# Altium PCB MainBoard.PcbDoc (part 5 of 5)
Units mm, origin at the board's own origin, x right, y up, seen from the top; angles counter-clockwise.
Board outline 82.5 x 82.5 mm, 2 copper layers (Top Layer, Bottom Layer); 145 components, 141 nets, 702 pads, 289 vias.
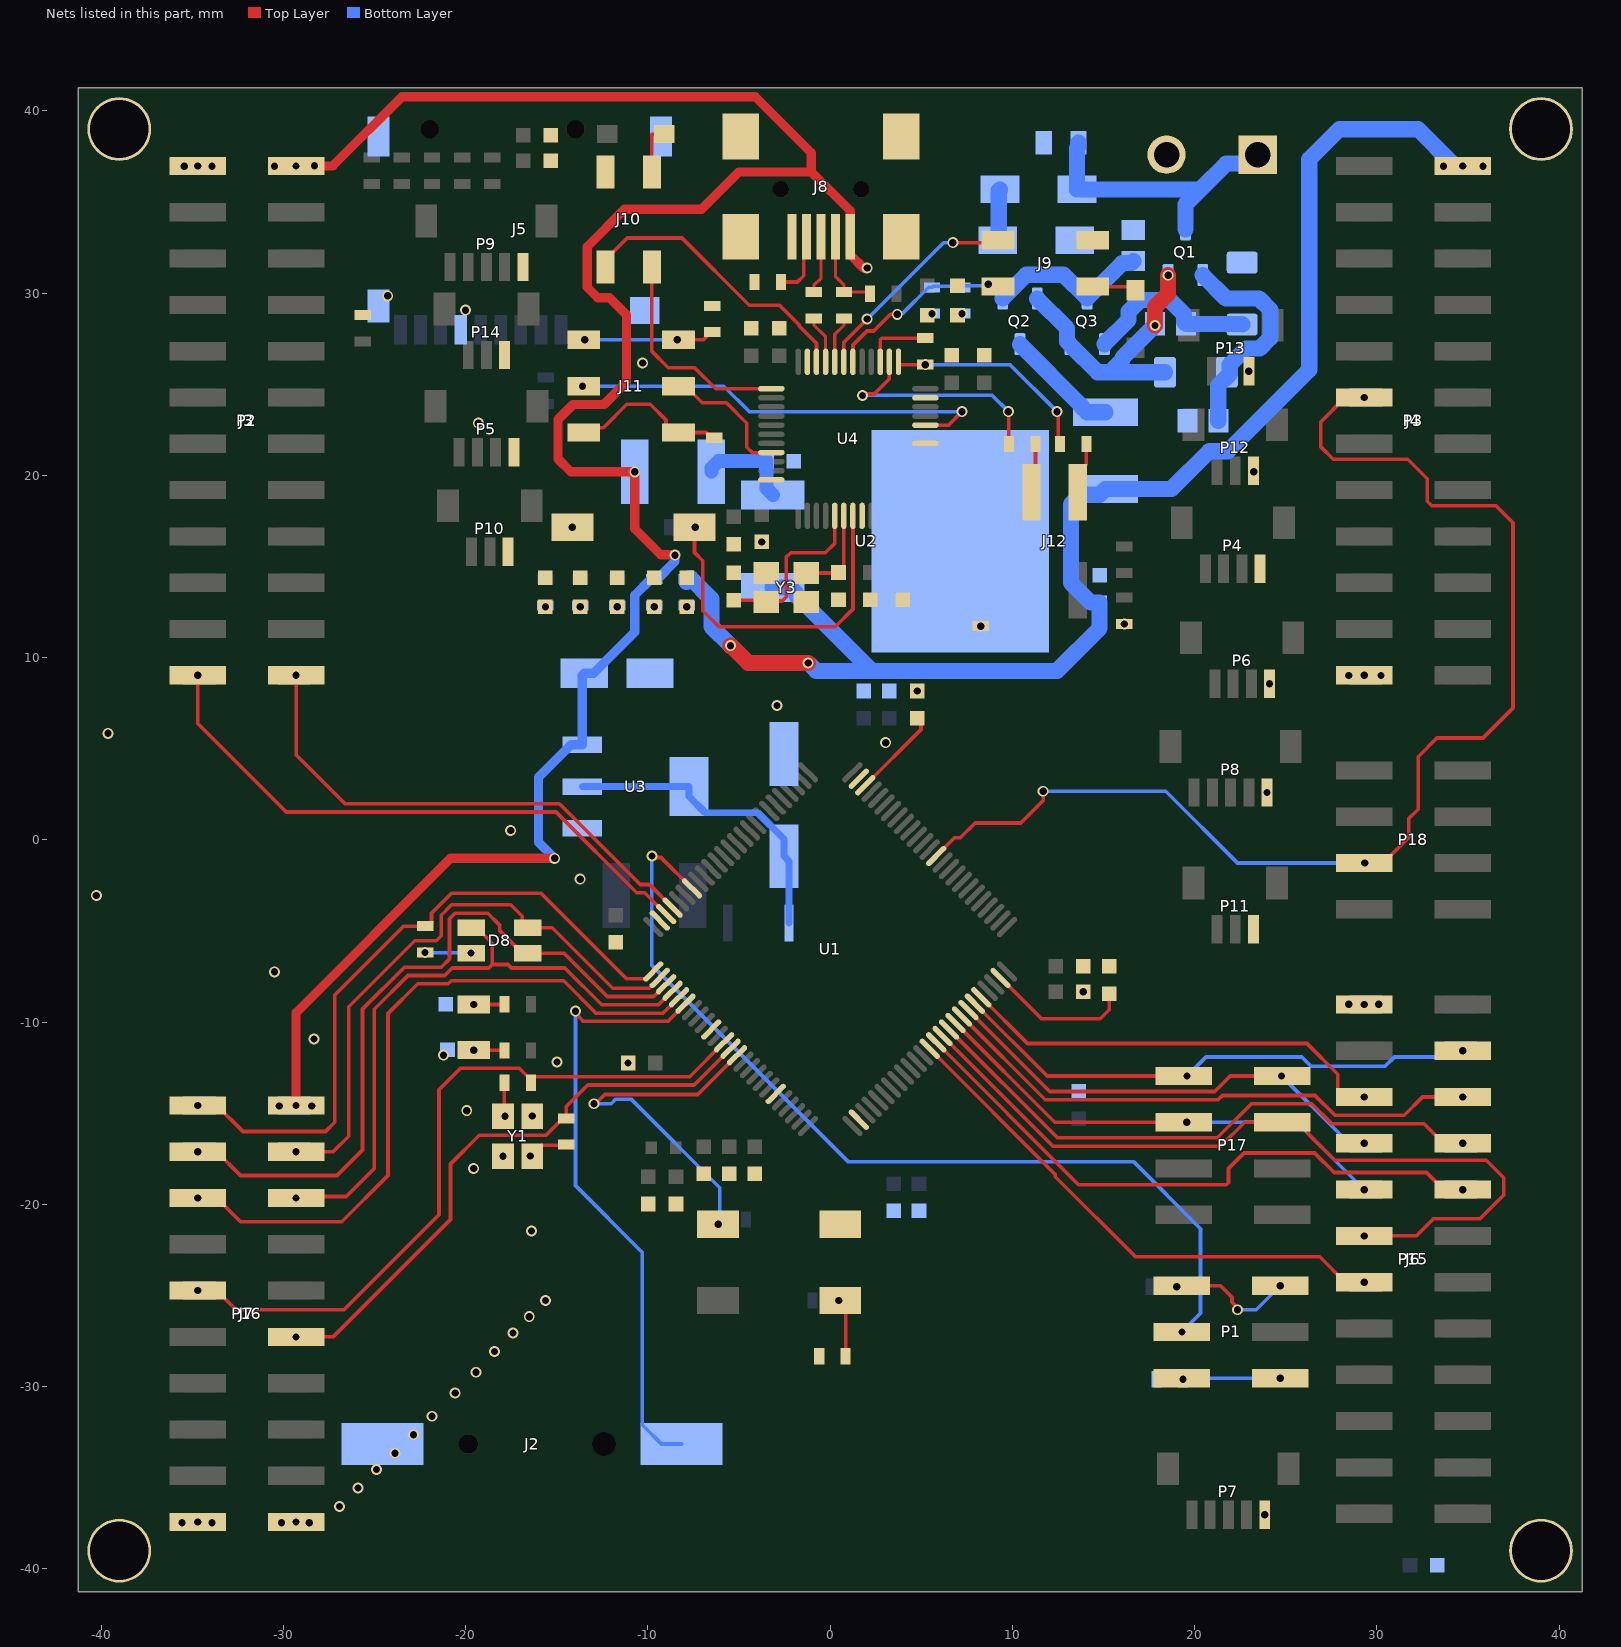
[diagram p3: the nets of this part, all layers, seen from the top]

## Via types
v1: diameter 0.6, hole 0.4, Top Layer to Bottom Layer, 223 vias
v2: diameter 0.6, hole 0.4, Top Layer to Bottom Layer, tented both sides, 66 vias

## Nets (pads, with @x,y where several pads share a name; then routed paths per layer and width w, separated by ;. In a path a pad name is that pad's centre, name@x,y a point inside that pad or via, vN(x,y) a via of type N, cw(c..) or ccw(c..) an arc to the next point about the centre after c; other vN are vias at no path point) (continued)
D15: J4.12 P3.11 P18.5 U1.62 | length 68.3
  Top Layer w0.2: U1.62@5.816,-0.891 5.822,-0.891 6.821,0.108 7.14,0.108 7.959,0.927 10.452,0.927 11.684,2.159 v2(11.684,2.667) ; v1(29.3,24.27) 28.25,24.27 26.924,22.944 26.924,21.555 27.603,20.876 30.997,20.876 31.003,20.882 31.696,20.882 32.766,19.812 32.766,18.573 33.003,18.336 36.528,18.336 37.465,17.399 37.465,7.239 35.814,5.588 33.285,5.588 32.258,4.561 32.258,1.677 31.75,1.169 31.75,0.13 30.35,-1.27 v1(29.337,-1.27)
  Bottom Layer w0.2: v2(11.684,2.667) 18.415,2.667 22.352,-1.27 v1(29.337,-1.27)
D_N: J8.2 R30.1 R31.1 | length 4.7
  Top Layer w0.178: J8.2@0.3,33.087 0.3,30.888 0.762,30.426 R31.1@0.762,30.062 2.106,30.062 R30.1@2.196,29.972
D_P: J8.3 R32.1 | length 3.2
  Top Layer w0.178: R32.1@-0.889,30.062 -0.889,30.426 -0.5,30.815 J8.3@-0.5,33.087
Di_N: R31.2 U4.32 | length 2.6
  Top Layer w0.178: U4.32@0.25,26.225 0.25,27.736 0.762,28.248 R31.2@0.762,28.612
Di_P: R32.2 U4.33 | length 2.7
  Top Layer w0.178: R32.2@-0.889,28.612 -0.889,28.248 -0.25,27.609 U4.33@-0.25,26.225
E0: J3.2 P2.1 U1.97 | length 28.5
  Top Layer w0.2: v1(-29.3,9.03) -29.3,4.662 -26.616,1.978 -14.855,1.978 -10.426,-2.451 -9.913,-2.451 U1.97@-8.644,-3.72
E1: J3.1 P2.2 U1.98 | length 32.7
  Top Layer w0.2: v1(-34.7,9.03) -34.7,6.379 -29.845,1.524 -15.043,1.524 -10.614,-2.905 -10.172,-2.905 -9.44,-3.637 -9.434,-3.637 U1.98@-8.998,-4.073
E2: J7.2 P16.1 R28.1 U1.1 | length 37.5
  Top Layer w0.2: v1(-34.7,-14.57) -33.65,-14.57 -32.218,-16.002 -27.686,-16.002 -27.178,-15.494 -27.178,-8.509 -23.405,-4.736 R28.1@-22.225,-4.736 -22.05,-4.736 -21.875,-4.561 -21.875,-4.031 -20.765,-2.921 -15.875,-2.921 -11.176,-7.62 -10.105,-7.62 U1.1@-9.705,-7.22
E3: D8.4 J7.3 P16.4 U1.2 | length 32.7
  Top Layer w0.2: v1(-29.3,-17.11) -27.27,-17.11 -26.416,-16.256 -26.416,-9.151 -22.797,-5.532 -21.609,-5.532 -21.336,-5.259 -21.336,-4.134 -20.77,-3.568 -20.713,-3.568 -20.701,-3.556 -17.526,-3.556 -16.889,-4.193 -16.889,-4.522 D8.4@-16.585,-4.826 -15.24,-4.826 -11.922,-8.144 -9.922,-8.144 U1.2@-9.351,-7.573
E4: D8.3 J7.4 P16.3 U1.3 | length 40.4
  Top Layer w0.2: v1(-34.7,-17.11) -33.65,-17.11 -32.345,-18.415 -27.051,-18.415 -25.654,-17.018 -25.654,-9.285 -23.354,-6.985 -21.336,-6.985 -20.882,-6.531 -20.882,-4.322 -20.582,-4.022 -18.788,-4.022 -18.135,-4.675 -18.135,-4.977 -17.482,-5.63 -16.885,-6.226 -14.602,-6.226 -12.23,-8.598 -9.675,-8.598 -9.44,-8.363 -9.434,-8.363 U1.3@-8.998,-7.927
E5: D8.2 J7.5 P16.6 U1.4 | length 35
  Top Layer w0.2: v1(-29.3,-19.65) -29.216,-19.566 -26.551,-19.566 -25.019,-18.034 -25.019,-9.292 -23.166,-7.439 -21.145,-7.439 -20.736,-7.03 -18.733,-7.03 -18.542,-6.839 ; D8.2@-19.685,-4.826 -19.385,-4.826 -18.789,-5.422 -18.542,-5.668 -18.542,-6.839 ; U1.4@-8.644,-8.28 -8.65,-8.28 -9.422,-9.052 -12.538,-9.052 -14.56,-7.03 -17.482,-7.03 -17.673,-6.839 -18.542,-6.839
E6: J7.6 P16.5 U1.5 | length 38.7
  Top Layer w0.2: v1(-34.7,-19.65) -33.65,-19.65 -32.345,-20.955 -26.797,-20.955 -24.257,-18.415 -24.257,-9.525 -22.625,-7.893 -20.957,-7.893 -20.793,-7.729 -14.623,-7.729 -12.846,-9.506 -9.169,-9.506 -8.296,-8.634 U1.5@-8.291,-8.634
E7: J6.11 P15.12 U1.38 | length 29.2
  Top Layer w0.2: U1.38@5.462,-11.462 12.356,-18.356 12.356,-18.488 16.747,-22.879 26.859,-22.879 28.25,-24.27 v1(29.3,-24.27)
E8: J6.16 P15.15 U1.39 | length 34.1
  Top Layer w0.2: U1.39@5.816,-11.109 13.63,-18.923 21.737,-18.923 21.854,-18.806 21.854,-18.034 22.708,-17.18 26.578,-17.18 27.651,-18.253 32.713,-18.253 33.65,-19.19 v1(34.7,-19.19)
E9: J6.13 P15.14 P17.5 U1.40 | length 44.8
  Top Layer w0.2: U1.40@6.17,-10.755 12.216,-16.802 21.432,-16.802 22.74,-15.494 25.833,-15.494 26.233,-15.894 26.233,-16.133 27.679,-17.58 35.995,-17.58 36.957,-18.542 36.957,-19.484 35.657,-20.783 33.096,-20.783 32.149,-21.73 v1(29.3,-21.73)
E10: J6.18 P15.17 U1.41 | length 32.3
  Top Layer w0.2: U1.41@6.523,-10.402 12.469,-16.348 21.244,-16.348 23.114,-14.478 26.416,-14.478 27.505,-15.567 32.567,-15.567 33.65,-16.65 v1(34.7,-16.65)
E11: J6.15 P15.16 P17.6 U1.42 | length 26.1
  Top Layer w0.2: U1.42@6.877,-10.048 12.322,-15.494 P17.6@19.398,-15.494
  Bottom Layer w0.2: v1(19.558,-15.494) 25.604,-15.494 v1(29.3,-19.19)
E12: J6.20 P15.19 U1.43 | length 30.3
  Top Layer w0.2: U1.43@7.23,-9.695 11.798,-14.262 21.283,-14.262 21.521,-14.024 26.604,-14.024 27.693,-15.113 31.496,-15.113 32.499,-14.11 v1(34.7,-14.11)
E13: J6.17 P15.18 P17.7 U1.44 | length 25.5
  Top Layer w0.2: U1.44@7.584,-9.341 12.051,-13.808 21.095,-13.808 21.949,-12.954 P17.7@24.798,-12.954
  Bottom Layer w0.2: v1(24.765,-12.954) 28.061,-16.25 28.9,-16.25 v1(29.3,-16.65)
E14: J6.22 P15.21 P17.8 U1.45 | length 29.2
  Top Layer w0.2: U1.45@7.937,-8.988 11.904,-12.954 P17.8@19.398,-12.954
  Bottom Layer w0.2: v1(19.581,-12.958) 20.625,-11.914 25.877,-11.914 26.387,-12.424 30.447,-12.424 30.957,-11.914 34.356,-11.914 v1(34.7,-11.57)
E15: J6.19 P15.20 U1.46 | length 23.8
  Top Layer w0.2: U1.46@8.291,-8.634 10.833,-11.176 26.162,-11.176 27.85,-12.864 27.85,-13.71 28.25,-14.11 v1(29.3,-14.11)
GND: C1.1 C2.1 C3.1 C4.1 C5.1 C6.1 C7.1 C8.1 C9.1 C10.1 C11.1 C12.1 C13.1 C14.1 C15.1 C16.1 C17.1 C18.1 C19.1 C20.1 C21.1 C22.1 C23.2 C24.2 C25.1 C26.1 C27.1 C28.1 C29.1 C30.1 C31.1 C32.1 C33.1 C34.1 C35.1 C36.1 C37.1 C38.1 D1.1 D4.C D5.A D6.1 D7.1 D9.1 D13.1 D14.1 J1.2 J2.N J3.23 J4.24 J5.6 J5.G1 J5.G2 J5.G3 J5.G4 J6.23 J7.19 J7.20 J8.5 J8.Shell J9.4 J10.4 P2.24 P3.23 P4.4 P5.4 P6.4 P7.5 P8.5 P9.5 P10.3 P11.3 P12.3 P13.3 P14.3 P15.24 P16.19 P16.20 R4.1 R5.1 R7.1 R14.1 R16.1 R17.1 R26.1 R29.2 R35.1 Scr1.1 Scr2.1 Scr3.1 Scr4.1 SW2.1 SW3.1 U1.10 U1.20 U1.27 U1.74 U1.99 U2.3 U3.1 U4.8 U4.23 U4.35 U4.47 Y1.2 Y1.4 Y3.2 Y3.4
  other v1: -35.56,-37.465 -33.909,-37.465 -30.099,-37.465 -28.575,-37.465 -34.7,-37.43 -29.3,-37.43 23.844,-37.031 -11.088,-12.243 29.3,-9.03 28.448,-9.017 30.099,-9.017 28.448,9.017 30.226,9.017 29.3,9.03 -3.759,16.344 -35.433,36.957 -33.909,36.957 -34.7,36.97
  other v2: -26.924,-36.576 -25.908,-35.56 -24.892,-34.544 -23.876,-33.655 -22.86,-32.639 -21.844,-31.623 -20.574,-30.353 -19.431,-29.21 -18.415,-28.067 -17.399,-27.051 -16.51,-26.162 -15.621,-25.273 -16.383,-21.463 -19.558,-18.034 -17.945,-17.356 -16.345,-15.156 -19.939,-14.859 -14.986,-12.192 -21.209,-11.811 -28.321,-10.922 13.882,-8.331 -30.48,-7.239 -40.259,-3.048 -13.716,-2.159 -17.526,0.508 23.971,2.593 3.048,5.334 -39.624,5.842 -2.921,7.366 4.775,8.167 24.106,8.562 8.255,11.721 16.143,11.848 -14.145,17.145 23.241,20.193 -19.304,22.86 22.971,25.707 -10.287,26.162 -20.003,29.062 -24.276,29.845
H0: J7.10 P16.9 R10.2 U1.12 | length 40.1
  Top Layer w0.2: v1(-34.7,-24.73) -33.65,-24.73 -32.599,-25.781 -26.67,-25.781 -21.463,-20.574 -21.463,-13.716 -20.278,-12.531 -17.054,-12.531 -16.425,-13.16 R10.2@-16.425,-13.172 ; R10.2@-16.425,-13.335 R10.2@-16.425,-13.172 ; U1.12@-5.816,-11.109 -5.822,-11.109 -7.71,-12.997 -16.25,-12.997 R10.2@-16.425,-13.172
H1: J7.11 P16.12 R9.1 U1.13 | length 32.6
  Top Layer w0.2: v1(-29.3,-27.27) -27.27,-27.27 -20.828,-20.828 -20.828,-17.78 -19.258,-16.21 -15.586,-16.21 -14.653,-15.277 R9.1@-14.478,-15.277 -14.478,-14.628 -13.301,-13.451 -7.451,-13.451 U1.13@-5.462,-11.462
HD_5V: C23.1 F2.1 J3.24 J7.1 J8.1 P2.23 P16.2 R25.2 U3.3 | length 122.7
  Top Layer w0.508: v1(-29.3,36.97) -29.294,36.976 -27.286,36.976 -23.495,40.767 -4.112,40.767 -1.04,37.695 -1.04,36.645 ; P16.2@-29.075,-14.57 v1(-29.3,-14.57) -29.3,-9.488 -20.828,-1.016 v1(-15.113,-1.016) ; v1(-8.509,15.621) -8.527,15.639 -9.288,15.639 -10.719,17.069 v1(-10.719,20.193) -14.224,20.193 -14.93,20.899 -14.93,23.062 -14.108,23.884 -12.412,23.884 -11.176,25.12 -11.176,28.812 -12.11,29.746 -12.747,29.746 -13.327,30.326 -13.327,32.546 -11.278,34.596 -7.06,34.596 -5.011,36.645 -1.04,36.645 ; v1(2.032,31.369) 1.826,31.369 1.1,32.095 J8.1@1.1,33.087 1.096,33.091 1.096,34.509 -1.04,36.645
  Bottom Layer w0.508: v1(-15.113,-1.016) -16.002,-0.127 -16.002,3.432 -14.223,5.211 U3.3@-13.598,5.211 -13.598,9.03 C23.1@-13.484,9.144 -12.984,9.144 -10.726,11.402 -10.726,13.415 -9.827,14.314 R25.2@-9.652,14.314 -9.477,14.314 -8.509,15.282 v1(-8.509,15.621)
  other v1: -30.226,-14.605 -28.448,-14.605 -30.48,36.957 -28.29,36.976
HD_Vin: C21.2 F1.1 J4.1 P3.2 R27.2 U2.1 | length 79.6
  Top Layer w0.889: v1@-5.461,10.668 -4.499,9.706 v1(-1.208,9.706)
  Bottom Layer w0.889: R27.2@-7.874,14.314 -7.874,14.15 -7.673,14.351 -7.648,14.351 -6.513,13.216 -6.513,11.704 v1(-5.464,10.654) ; U2.1@-3.144,13.843 -2.194,13.843 -1.838,13.487 -1.838,13.39 2.28,9.271 ; v1@-1.143,9.652 -0.762,9.271 2.28,9.271 ; v1(34.7,36.97) 34.2,36.97 34.144,37.026 34.144,37.103 32.258,38.989 27.94,38.989 26.289,37.338 26.289,25.791 21.816,21.318 20.795,21.318 18.73,19.253 F1.1@15.113,19.253 14.795,18.936 13.729,18.936 13.208,18.415 13.208,14.109 14.3,13.017 C21.2@14.783,13.017 14.783,11.608 12.446,9.271 2.28,9.271
  other v1: 33.655,36.957 35.814,36.957
LED_STLINK: J9.1 R38.1 R40.1 U4.30 | length 9.8
  Top Layer w0.2: U4.30@1.25,26.225 1.25,27.151 2.02,27.921 2.398,27.921 3.306,28.829 v1(3.683,28.829)
  Bottom Layer w0.2: v1(3.683,28.829) 3.76,28.906 4.003,28.906 5.413,30.316 R38.1@5.588,30.316 5.651,30.379 7.175,30.379 R40.1@7.239,30.316 7.33,30.407 8.59,30.407 v1(8.667,30.483)
M_MCU_BOOT0: P1.3 U1.94 | length 51.1
  Top Layer w0.2: v1(-9.779,-0.889) -9.702,-0.966 -9.283,-0.966 -7.589,-2.659 U1.94@-7.584,-2.659
  Bottom Layer w0.2: v1(-9.779,-0.889) -9.779,-6.894 0.98,-17.653 16.637,-17.653 20.32,-21.336 20.32,-25.98 v1(19.3,-27)
MCU-RESET: R8.1 SW2.2 U1.14 | length 19.7
  Top Layer w0.2: v1(-12.954,-14.478) -12.872,-14.478 -12.364,-13.97 -7.269,-13.97 -5.115,-11.816 U1.14@-5.109,-11.816
  Bottom Layer w0.2: v1(-12.954,-14.478) -12.011,-14.478 -11.757,-14.224 -10.922,-14.224 -6.059,-19.087 R8.1@-6.059,-20.828
  other v1: -6.144,-21.082
NetC8_2: C8.2 U1.49 | length 8
  Top Layer w0.2: U1.49@9.351,-7.573 11.592,-9.814 14.824,-9.814 15.316,-9.322 C8.2@15.316,-8.446
NetC13_2: C13.2 U1.73 | length 5
  Top Layer w0.2: U1.73@1.927,2.998 4.983,6.054 4.983,6.459 C13.2@4.775,6.667
NetC16_2: C16.2 R9.2 Y1.1 | length 2.3
  Top Layer w0.2: v1(-16.446,-17.348) -16.438,-17.356 Y1.1@-16.345,-17.356 -16.345,-17.256 -15.845,-16.756 -15.331,-16.756 -15.328,-16.753 -14.504,-16.753 R9.2@-14.478,-16.727
NetC17_2: C17.2 R10.1 Y1.3 | length 1.8
  Top Layer w0.2: Y1.3@-17.945,-15.156 -17.875,-15.086 R10.1@-17.875,-13.335
  other v1: -17.844,-15.164
NetC18_2: C18.2 R12.2 Y2.1 | length 1.7
  Top Layer w0.2: v1(-19.558,-11.537) -17.89,-11.537 R12.2@-17.87,-11.557
NetC19_2: C19.2 R13.1 Y2.2 | length 1.7
  Top Layer w0.2: v1(-19.558,-9.037) -17.89,-9.037 R13.1@-17.87,-9.017
NetC20_2: C20.2 D2.C J1.1 Q1.3 | length 15.8
  Bottom Layer w0.889: C20.2@13.625,38.252 13.625,38.052 13.545,37.973 D2.C@13.545,35.687 20.32,35.687 ; Q1.3@19.492,33.498 19.492,34.859 20.32,35.687 ; J1.1@23.455,37.592 22.966,37.103 21.736,37.103 20.32,35.687
NetC22_2: C22.2 F2.0 U2.2 | length 5.4
  Bottom Layer w0.762: F2.0@-6.517,20.193 -6.517,20.396 -6.136,20.777 C22.2@-3.493,20.777 -3.493,19.272 U2.2@-3.144,18.923
NetC24_1: C24.1 F3.0 U3.2 U3.4 | length 17.3
  Bottom Layer w0.381: U3.2@-13.598,2.921 U3.4@-7.738,2.921 -7.738,2.371 -6.853,1.486 -3.971,1.486 -2.54,0.055 C24.1@-2.54,-0.895 -2.261,-1.174 F3.0@-2.261,-4.572
NetD1_2: D1.2 R3.1
  other v1: -15.621,12.789
NetD2_A: D2.A D4.A | length 2.8
  Bottom Layer w0.889: D4.A@9.188,32.893 9.252,32.956 9.252,35.623 D2.A@9.315,35.687
NetD3_A: D3.A Q1.1 R16.2 | length 12.2
  Bottom Layer w0.889: Q1.1@20.442,30.988 20.442,30.977 21.717,29.702 23.526,29.702 24.155,29.073 24.155,27.547 23.557,26.95 22.802,26.95 21.973,26.121 21.973,26.111 21.922,26.06 21.922,25.56 21.297,24.935 R16.2@21.297,22.987
NetD3_K: D3.K Q1.2 Q2.2 Q3.2 R15.2 | length 15.5
  Top Layer w0.889: v2(17.819,28.221) 17.819,29.234 18.542,29.957 v2(18.542,30.977)
  Bottom Layer w0.889: Q2.2@11.364,29.703 11.364,29.692 12.998,28.058 12.998,27.343 Q3.2@13.147,27.193 ; Q3.2@13.296,27.032 14.675,25.654 15.824,25.654 ; v2(17.819,28.221) 16.041,26.442 16.041,26.342 15.588,25.89 15.824,25.654 ; D3.K@18.366,25.654 15.824,25.654
NetD5_K: D5.K Q3.1 R15.1 | length 9.6
  Bottom Layer w0.889: Q3.1@15.047,27.193 15.047,27.204 16.373,28.53 16.373,28.987 17.002,29.616 18.636,29.616 19.413,28.838 19.413,28.427 R15.1@19.519,28.321 19.544,28.296 22.581,28.296 D5.K@22.606,28.272
NetD6_2: D6.2 R24.1
  other v1: -13.716,12.789
NetD7_2: D7.2 R25.1
  other v1: -9.652,12.789
NetD8_1: D8.1 R28.2 | length 2.5
  Bottom Layer w0.2: v1(-22.225,-6.186) -22.215,-6.196 -19.715,-6.196 v1(-19.705,-6.206)
NetD9_2: D9.2 R27.1
  other v1: -7.874,12.789
NetD10_A: D10.A J9.2 | length 2.4
  Top Layer w0.2: J9.2@14.411,30.353 16.556,30.353 D10.A@16.764,30.145
NetD11_A: D11.A J10.2 | length 2.8
  Top Layer w0.2: J10.2@-9.779,36.636 -9.779,38.721 -9.112,38.721 D11.A@-9.098,38.735
NetD12_1: D12.1 R38.2
  other v1: 5.588,28.866
NetD13_2: D13.2 R40.2
  other v1: 7.239,28.866
NetD14_2: D14.2 R41.2
  other v1: -11.684,12.789
NetF1_0: F1.0 Q2.3 | length 6.3
  Bottom Layer w0.889: Q2.3@10.414,27.193 10.414,27.182 13.779,23.816 13.779,23.772 14.097,23.455 F1.0@15.113,23.455
NetJ2_P: J2.P U1.6 | length 33.5
  Top Layer w0.2: v1(-13.97,-9.398) -13.97,-9.506 -13.676,-9.8 -13.676,-9.819 -13.535,-9.96 -8.91,-9.96 U1.6@-7.937,-8.988
  Bottom Layer w0.2: v1(-13.97,-9.398) -13.97,-18.969 -10.304,-22.635 -10.304,-32.097 -9.254,-33.147 J2.P@-8.154,-33.147
NetJ8_4: J8.4 R29.1 | length 3.6
  Top Layer w0.2: R29.1@-2.704,30.607 -1.791,30.607 -1.45,30.948 -1.45,32.937 J8.4@-1.3,33.087
NetJ11_1: J11.1 J11.2 R34.1 | length 8.7
  Top Layer w0.2: J11.2@-13.522,22.352 -13.261,22.613 -12.439,22.613 -11.157,23.895 -9.865,23.895 -9.005,23.035 -9.005,22.752 -8.605,22.352 -6.816,22.352 -6.525,22.061 R34.1@-6.35,22.061
NetJ11_5: J11.5 J11.6 R35.2 | length 7.1
  Top Layer w0.2: J11.5@-8.322,27.432 -6.943,27.432 -6.525,27.85 R35.2@-6.477,27.85
  Bottom Layer w0.2: v1(-13.462,27.432) v1(-8.382,27.432)
NetJ12_1: J12.1 R36.2 | length 2.8
  Top Layer w0.2: J12.1@13.589,19.083 13.589,20.133 14.06,20.604 R36.2@14.06,21.717
NetJ12_3: J12.3 R37.2 | length 2.7
  Top Layer w0.2: J12.3@11.049,19.083 11.266,19.3 R37.2@11.266,21.717
NetP1_1: P1.1 P1.2 R11.1 | length 6.7
  Top Layer w0.2: P1.1@19.3,-24.46 21.412,-24.46 22.048,-25.096 22.048,-25.368 22.352,-25.673 v1(22.352,-25.781)
  Bottom Layer w0.2: v1(22.352,-25.781) 23.379,-25.781 v1(24.7,-24.46)
  other v1: 19.013,-24.511
NetP1_5: P1.5 P1.6 R14.2 | length 5.4
  Bottom Layer w0.2: v1(19.357,-29.591) 19.408,-29.54 v1(24.7,-29.54)
NetQ2_1: Q2.1 Q3.3 R17.2 | length 9.1
  Bottom Layer w0.889: Q2.1@9.464,29.703 9.464,29.714 10.756,31.006 12.805,31.006 Q3.3@14.097,29.714 ; Q3.3@14.097,29.703 Q3.3@14.097,29.714 ; R17.2@16.637,31.75 16.531,31.644 16.027,31.644 Q3.3@14.097,29.714
NetR6_2: R6.2 R7.2 SW1.1 | length 3.3
  Top Layer w0.2: v1(0.471,-25.273) SW1.1@0.556,-25.273 0.852,-25.569 R7.2@0.852,-28.321
NetR33_2: R33.2 U4.27 | length 3.7
  Top Layer w0.2: U4.27@2.75,26.225 2.75,27.445 2.827,27.522 R33.2@5.221,27.522
RST-STM8: U4.18
STL-RESET: R39.1 SW3.2 U4.7 | length 18.9
  Top Layer w0.2: SW3.2@-7.445,17.145 -7.445,15.769 -6.985,15.309 -6.985,12.573 -6.096,11.684 0.273,11.684 1.25,12.661 U4.7@1.25,17.775
  other v1: -7.403,17.145
STL_BOOT0: J11.3 U4.44 | length 6.7
  Top Layer w0.2: J11.3@-8.322,24.892 -7.922,24.892 -7.011,23.981 -5.693,23.981 -4.572,22.86 -4.572,21.542 -4.276,21.246 U4.44@-3.937,21.246
STL_BOOT1: J11.4 U4.20 | length 23.7
  Top Layer w0.2: U4.20@5.225,22.75 6.494,22.75 v1(7.239,23.495)
  Bottom Layer w0.2: v1(-13.589,24.892) -5.842,24.892 -4.445,23.495 v1(7.239,23.495)
STL_OSC_IN: C38.2 U4.5 Y3.3 | length 9.7
  Top Layer w0.2: C38.2@-5.283,13.144 -3.614,13.144 Y3.3@-3.513,13.043 -3.454,13.102 -2.63,13.102 -2.418,13.315 -2.418,15.499 -2.169,15.748 -0.262,15.748 0.25,16.26 U4.5@0.25,17.775
STL_OSC_OUT: C37.2 U4.6 Y3.1 | length 5
  Top Layer w0.2: Y3.1@-1.313,14.643 0.431,14.643 0.75,14.962 U4.6@0.75,17.775
STL_RX: J9.3 U4.31 | length 11.8
  Top Layer w0.2: U4.31@0.75,26.225 0.754,26.229 0.754,27.297 v1(2.032,28.575) ; v1(6.731,32.766) 9.084,32.766 J9.3@9.211,32.893
  Bottom Layer w0.2: v1(2.032,28.575) 6.223,32.766 v1(6.731,32.766)
STL_SWCLK: J10.1 U4.37 | length 12
  Top Layer w0.2: J10.1@-9.779,31.436 -9.779,26.797 -8.89,25.908 -7.437,25.908 -6.279,24.75 U4.37@-3.225,24.75
STL_SWDIO: J10.3 U4.34 | length 15.9
  Top Layer w0.2: J10.3@-12.319,31.436 -12.319,31.836 -11.135,33.02 -8.128,33.02 -4.445,29.337 -2.779,29.337 -1.693,28.251 -1.693,28.19 -0.75,27.247 U4.34@-0.75,26.225
STM32_SWCLK: R37.1 U4.26 | length 12.9
  Top Layer w0.2: v1(1.778,24.384) 1.855,24.461 2.416,24.461 3.25,25.295 U4.26@3.25,26.225 ; v1(9.779,23.495) 9.797,23.477 9.797,21.736 R37.1@9.816,21.717
  Bottom Layer w0.2: v1(1.778,24.384) 8.89,24.384 v1(9.779,23.495)
STM32_SWDIO: R33.1 R36.1 U4.25 | length 11.7
  Top Layer w0.2: U4.25@3.75,26.225 3.75,26.118 3.796,26.072 v1(5.221,26.072) ; v1(12.446,23.495) 12.523,23.418 12.523,21.804 R36.1@12.61,21.717
  Bottom Layer w0.2: v1(5.221,26.072) 9.869,26.072 v1(12.446,23.495)
pads on no net: J2. J5. J8.MH1 J8.MH2 P4.MP1 P4.MP2 P5.MP1 P5.MP2 P6.MP1 P6.MP2 P7.MP1 P7.MP2 P8.MP1 P8.MP2 P9.MP1 P9.MP2 P10.MP1 P10.MP2 P11.MP1 P11.MP2 P12.MP1 P12.MP2 P13.MP1 P13.MP2 P14.MP1 P14.MP2 U4.1 U4.2 U4.3 U4.4 U4.10 U4.11 U4.12 U4.13 U4.14 U4.15 U4.16 U4.17 U4.19 U4.21 U4.22 U4.28 U4.29 U4.38 U4.39 U4.40 U4.41 U4.42 U4.43 U4.45 U4.46

## Polygon pours and split planes (outlines as drawn)
GND on Top Layer "GND_L01_P000" (solid, remove dead copper, pour order 0): -41.148,41.148 41.148,41.148 41.148,-41.148 -41.148,-41.148
GND on Bottom Layer "GND_L02_P001" (solid, pour order 1): 41.148,41.148 41.148,-41.148 40.964,-40.964 -41.148,-40.964 -41.148,41.148 -41.122,41.122 -41.148,41.148

## Silkscreen, mask and mechanical layers (free items; w line width, h text height)
Top Overlay:
  lines w0.1: -38.862,-37.973 -38.862,-13.081 ; -38.735,7.874 -38.735,36.703 ; -21.385,-1.714 -15.748,-1.714 ; -18.567,-3.302 -18.567,-0.127 ; -18.161,13.716 -16.383,15.494 ; -16.319,15.494 -16.383,15.494 ; -13.795,15.494 -16.256,15.494 -16.383,15.494 ; 38.735,-37.719 38.735,-8.89 ; 38.735,7.874 38.735,36.957 ; -21.385,-3.302 -15.748,-3.302 -15.748,-0.127 -21.385,-0.127 -21.385,-3.302
  lines w0.154: -14.554,6.401 -14.554,10.922 ; -12.649,6.401 -12.649,10.922 ; -10.744,6.401 -10.744,10.922 ; -8.839,6.401 -8.839,10.922 ; 20.955,31.115 20.955,33.592 ; -16.332,6.35 -6.985,6.35 -6.985,10.922 -16.332,10.922 -16.332,6.35 ; 15.955,31.115 25.955,31.115 25.955,33.592 15.955,33.592 15.955,31.115
  lines w0.254: -40.767,-31.115 -37.084,-31.115 ; -40.64,-35.56 -36.957,-35.56 ; -40.64,-33.528 -36.957,-33.528 ; -40.64,-28.575 -36.957,-28.575 ; -40.64,-26.035 -36.957,-26.035 ; -40.64,-23.495 -36.957,-23.495 ; -40.64,-20.828 -36.957,-20.828 ; -40.64,-18.415 -36.957,-18.415 ; -40.64,-15.748 -36.957,-15.748 ; -40.513,10.16 -36.83,10.16 ; -40.513,12.7 -36.83,12.7 ; -40.513,15.24 -36.83,15.24 ; -40.513,17.653 -36.83,17.653 ; -40.513,20.32 -36.83,20.32 ; -40.513,22.733 -36.83,22.733 ; -40.513,25.4 -36.83,25.4 ; -40.513,27.94 -36.83,27.94 ; -40.513,30.353 -36.83,30.353 ; -40.513,32.893 -36.83,32.893 ; -40.513,35.56 -36.83,35.56 ; -24.638,4.953 -24.257,4.953 -23.622,5.588 -23.622,31.369 -23.622,31.75 -22.86,32.512 ; -23.622,14.605 -23.622,14.732 -21.971,16.383 ; -23.622,19.177 -22.098,20.701 ; -23.622,25.527 -23.495,25.527 -22.098,26.924 ; 8.001,4.826 8.001,8.763 ; 10.16,11.684 10.16,11.176 10.16,8.763 ; 11.557,-28.321 16.637,-28.321 ; 11.557,-25.654 16.637,-25.654 ; 12.192,-19.304 15.875,-19.304 ; 12.192,-16.764 15.875,-16.764 ; 12.192,-14.097 15.875,-14.097 ; 14.034,-30.607 14.034,-23.368 ; 14.034,-22.352 14.034,-11.874 ; 17.018,-34.417 15.494,-32.893 15.367,-32.893 -9.017,-32.893 ; 17.526,0.127 17.526,0.508 18.796,1.778 ; 17.526,7.239 17.526,7.366 18.796,8.636 ; 17.526,11.176 10.541,11.176 10.541,-5.588 17.526,-5.588 ; 17.526,12.827 17.526,13.081 18.923,14.478 ; 17.526,18.796 18.923,20.193 ; 18.71,-4.404 17.526,-5.588 ; 19.05,25.527 17.526,24.003 ; 36.83,-2.667 40.64,-2.667 ; 36.83,-0.127 40.64,-0.127 ; 36.83,2.667 40.513,2.667 ; 36.957,-35.433 40.64,-35.433 ; 36.957,-32.893 40.64,-32.893 ; 36.957,-30.353 40.64,-30.353 ; 36.957,-27.94 40.64,-27.94 ; 36.957,-25.273 40.64,-25.273 ; 36.957,-22.86 40.64,-22.86 ; 36.957,-20.193 40.64,-20.193 ; 36.957,-17.653 40.64,-17.653 ; 36.957,-15.24 40.64,-15.24 ; 36.957,-12.7 40.64,-12.7 ; 36.957,-10.033 40.64,-10.033 ; 36.957,10.414 40.64,10.414 ; 36.957,12.954 40.64,12.954 ; 36.957,15.494 40.64,15.494 ; 36.957,17.907 40.64,17.907 ; 36.957,20.574 40.64,20.574 ; 36.957,22.987 40.64,22.987 ; 36.957,25.654 40.64,25.654 ; 36.957,28.194 40.64,28.194 ; 36.957,30.607 40.64,30.607 ; 36.957,33.147 40.64,33.147 ; 36.957,35.814 40.64,35.814 ; 38.735,-4.572 38.735,4.826 ; -9.017,-32.893 -10.668,-31.242 -12.573,-31.242 -15.875,-34.544 ccw(c-18.86,-33.867) -21.844,-34.544 -10.668,-34.544 -9.017,-32.893 ; 10.16,8.763 5.842,8.763 5.842,4.826 10.16,4.826 10.16,8.763 ; 17.526,-5.588 17.526,24.003 ; 17.526,24.003 17.526,23.876 17.526,24.003 ; -39.353,-2.286 -32.353,-2.286 -32.353,4.714 -39.353,4.714 -39.353,-2.286 ; -39.243,-11.049 -32.243,-11.049 -32.243,-4.049 -39.243,-4.049 -39.243,-11.049 ; -31.623,-5.715 -24.384,-5.715 -24.384,4.953 -31.623,4.953 -31.623,-5.715 ; 11.43,-30.607 16.764,-30.607 16.764,-23.368 11.43,-23.368 11.43,-30.607 ; 18.288,-40.894 25.4,-40.894 25.4,-38.227 18.288,-38.227 18.288,-40.894
  text "GND" at -40.923,35.831 h1
  text "5V" at -38.764,35.831 h1
  text "A13" at 36.547,35.831 h1
  text "VIN" at 38.706,35.831 h1
  text "A11" at 36.576,33.528 h1
  text "A12" at 38.735,33.528 h1
  text "A15" at -40.894,33.274 h1
  text "A14" at -38.735,33.274 h1
  text "GND" at 15.955,31.115 h1
  text "VIN" at 20.955,31.115 h1
  text "A9" at 36.512,30.988 h1
  text "A10" at 38.798,30.988 h1
  text "C11" at -40.957,30.734 h1
  text "C10" at -38.672,30.734 h1
  text "C9" at 36.512,28.448 h1
  text "A8" at 38.798,28.448 h1
  text "D0" at -40.957,28.194 h1
  text "C12" at -38.672,28.194 h1
  text "C7" at 36.512,25.908 h1
  text "C8" at 38.798,25.908 h1
  text "D2" at -40.957,25.654 h1
  text "D1" at -38.672,25.654 h1
  text "D15" at 36.512,23.368 h1
  text "C6" at 38.798,23.368 h1
  text "D4" at -40.957,23.114 h1
  text "D3" at -38.672,23.114 h1
  text "STM32F103C8T6" at -2.048,21.524 h0.6
  text "D13" at 36.512,20.955 h1
  text "D14" at 38.798,20.955 h1
  text "D6" at -40.957,20.701 h1
  text "D5" at -38.672,20.701 h1
  text "D11" at 36.512,18.288 h1
  text "D12" at 38.798,18.288 h1
  text "B3" at -40.957,18.034 h1
  text "D7" at -38.672,18.034 h1
  text "D9" at 36.512,15.748 h1
  text "D10" at 38.798,15.748 h1
  text "B5" at -40.957,15.494 h1
  text "B4" at -38.672,15.494 h1
  text "B15" at 36.512,13.208 h1
  text "D8" at 38.798,13.208 h1
  text "B7" at -40.957,12.954 h1
  text "B6" at -38.672,12.954 h1
  text "B13" at 36.512,10.668 h1
  text "B14" at 38.798,10.668 h1
  text "B9" at -40.957,10.414 h1
  text "B8" at -38.672,10.414 h1
  text "CAN1" at 10.541,9.915 h0.7
  text "SWD" at 5.715,8.839 h0.7
  text "A11" at 10.576,8.323 h0.7
  text "A12" at 13.243,8.323 h0.7
  text "GND" at 15.529,8.323 h0.7
  text "GND" at 36.512,8.255 h1
  text "B12" at 38.798,8.128 h1
  text "E1" at -40.957,8.001 h1
  text "E0" at -38.672,7.874 h1
  text "I2C3" at 10.541,7.121 h0.7
  text "STLINK RESET" at -17.941,6.604 h1 r90
  text "3V3 MCU" at -14.554,6.35 h0.8 r90
  text "3V3 STLINK" at -12.649,6.35 h0.7 r90
  text "3V3 STLINK" at -10.744,6.35 h0.7 r90
  text "5V" at -8.839,6.35 h0.7 r90
  text "VIN" at -6.934,6.35 h0.7 r90
  text "A8" at 13.116,5.529 h0.7
  text "GND" at 15.529,5.529 h0.7
  text "A9" at 10.48,5.508 h0.7
  text "POWER LED" at -16.415,4.902 h0.7
  text "SWCLK" at 8.064,4.858 h1 r90
  text "SWDIO" at 10.223,4.858 h1 r90
  text "TIMMER" at 36.449,4.864 h0.7
  text "USART1" at 10.541,4.327 h0.7
  text "SPI3" at -31.623,3.743 h0.7
  text "C9" at 36.512,2.921 h1
  text "C8" at 38.798,2.921 h1
  text "A8" at 10.685,2.735 h0.7
  text "A9" at 12.146,2.735 h0.7
  text "A10" at 13.86,2.735 h0.7
  text "GND" at 15.529,2.735 h0.7
  text "A15" at -31.444,2.227 h0.63
  text "C10" at -29.93,2.227 h0.63
  text "C11" at -28.507,2.227 h0.63
  text "C12" at -27.237,2.227 h0.63
  text "GND" at -26.254,2.227 h0.63
  text "USART3" at 10.541,1.533 h0.7
  text "CAN2" at -31.559,1.038 h0.7
  text "QR1" at -37.719,0.508 h1.52
  text "C7" at 36.512,0.381 h1
  text "C6" at 38.798,0.381 h1
  text "D10" at 10.83,-0.059 h0.7
  text "D8" at 12.273,-0.059 h0.7
  text "D9" at 13.987,-0.059 h0.7
  text "GND" at 15.529,-0.059 h0.7
  text "B5" at -31.207,-0.44 h0.7
  text "B6" at -28.794,-0.44 h0.7
  text "GND" at -26.508,-0.44 h0.7
  text "SPI2" at 10.541,-1.261 h0.7
  text "USART2" at -31.686,-1.629 h0.7
  text "PE5" at -21.385,-1.714 h0.7
  text "PE3" at -18.567,-1.714 h0.7
  text "D15" at 36.512,-2.159 h1
  text "D14" at 38.798,-2.159 h1
  text "B15" at 10.593,-2.853 h0.63
  text "B14" at 12.107,-2.853 h0.63
  text "B13" at 13.53,-2.853 h0.63
  text "B12" at 14.8,-2.853 h0.63
  text "GND" at 15.783,-2.853 h0.63
  text "D7" at -31.352,-3.107 h0.7
  text "D5" at -29.891,-3.107 h0.7
  text "D6" at -28.177,-3.107 h0.7
  text "GND" at -26.508,-3.107 h0.7
  text "LED RGB" at -21.412,-3.302 h0.7 r90
  text "PE2" at -21.385,-3.302 h0.7
  text "PE4" at -18.567,-3.302 h0.7
  text "I2C2" at 10.541,-3.928 h0.7
  text "I2C1" at -31.559,-4.306 h0.7
  text "D13" at 36.512,-4.572 h1
  text "D12" at 38.798,-4.699 h1
  text "A9" at 10.576,-5.52 h0.7
  text "A8" at 13.116,-5.52 h0.7
  text "GND" at 15.402,-5.52 h0.7
  text "B8" at -28.921,-5.774 h0.7
  text "GND" at -26.508,-5.774 h0.7
  text "B9" at -31.557,-5.795 h0.7
  text "STM32F407VxT6" at -6.35,-7.62 h1.52
  text "QR2" at -37.609,-8.255 h1.52
  text "GND" at 36.547,-9.762 h1
  text "B10" at 38.706,-9.762 h1
  text "TIMMER" at 11.684,-11.9 h0.7
  text "B11" at 36.576,-12.319 h1
  text "E14" at 38.735,-12.319 h1
  text "E14" at 11.782,-13.826 h1
  text "E13" at 14.034,-13.97 h1
  text "E15" at 36.512,-14.859 h1
  text "E12" at 38.798,-14.859 h1
  text "E2" at -41.084,-15.24 h1
  text "5V" at -38.798,-15.24 h1
  text "E11" at 11.811,-16.383 h1
  text "E9" at 13.97,-16.383 h1
  text "E13" at 36.512,-17.399 h1
  text "E10" at 38.798,-17.399 h1
  text "E4" at -41.084,-17.907 h1
  text "E3" at -38.798,-17.907 h1
  text "A3" at 11.747,-18.923 h1
  text "A2" at 14.034,-18.923 h1
  text "E11" at 36.512,-19.939 h1
  text "E8" at 38.798,-19.939 h1
  text "E6" at -41.084,-20.447 h1
  text "E5" at -38.798,-20.447 h1
  text "A1" at 11.747,-21.463 h1
  text "A0" at 14.034,-21.463 h1
  text "RESET" at 2.191,-21.971 h1
  text "E9" at 36.512,-22.479 h1
  text "B2" at 38.798,-22.479 h1
  text "C14" at -41.084,-22.987 h1
  text "C13" at -38.798,-22.987 h1
  text "E7" at 36.512,-24.892 h1
  text "B0" at 38.798,-24.892 h1
  text "1" at 11.43,-25.4 h1
  text "H0" at -41.084,-25.527 h1
  text "C15" at -38.798,-25.527 h1
  text "1" at 14.16,-25.654 h1
  text "WAKE UP" at 2.175,-26 h0.7
  text "B1" at 36.512,-27.559 h1
  text "C5" at 38.798,-27.559 h1
  text "C0" at -41.084,-28.067 h1
  text "H1" at -38.798,-28.067 h1
  text "BOOT1" at 11.557,-28.321 h0.7
  text "BOOT0" at 14.16,-28.321 h0.7
  text "C4" at 36.512,-30.099 h1
  text "A7" at 38.798,-30.099 h1
  text "0" at 11.874,-30.353 h1
  text "0" at 14.16,-30.353 h1
  text "C2" at -41.084,-30.607 h1
  text "C1" at -38.798,-30.607 h1
  text "A6" at 36.512,-32.639 h1
  text "A5" at 38.798,-32.639 h1
  text "A0" at -41.084,-33.147 h1
  text "C3" at -38.798,-33.147 h1
  text "https://github.com/3T-CODE/PIF_RYA_2025" at -9.144,-34.486 h1
  text "A4" at 36.512,-35.179 h1
  text "A3" at 38.798,-35.179 h1
  text "A2" at -41.084,-35.433 h1
  text "A1" at -38.798,-35.433 h1
  text "GND" at -41.138,-37.156 h1
  text "GND" at -38.738,-37.156 h1
  text "3V3" at 36.512,-37.592 h1
  text "3V3" at 38.798,-37.719 h1
  text "MAINBOARD V3" at -11.453,-39.127 h4
  text "SPI1" at 18.288,-39.488 h0.7
  text "A4" at 18.34,-41.08 h0.63
  text "A5" at 19.854,-41.08 h0.63
  text "A6" at 21.277,-41.08 h0.63
  text "A7" at 22.547,-41.08 h0.63
  text "GND" at 23.53,-41.08 h0.63
Bottom Overlay:
  drawing of 54 lines, arcs and shapes, not listed
  text "GND" at -38.96,35.831 h1
  text "5V" at -36.547,35.831 h1
  text "A13" at 38.637,35.831 h1
  text "VIN" at 41.177,35.831 h1
  text "A11" at 38.608,33.528 h1
  text "A12" at 41.148,33.528 h1
  text "A15" at -38.989,33.274 h1
  text "A14" at -36.576,33.274 h1
  text "A9" at 38.672,30.988 h1
  text "A10" at 41.084,30.988 h1
  text "C11" at -38.925,30.734 h1
  text "C10" at -36.639,30.734 h1
  text "C9" at 38.672,28.448 h1
  text "A8" at 41.084,28.448 h1
  text "D0" at -38.925,28.194 h1
  text "C12" at -36.639,28.194 h1
  text "C7" at 38.672,25.908 h1
  text "C8" at 41.084,25.908 h1
  text "D2" at -38.925,25.654 h1
  text "D1" at -36.639,25.654 h1
  text "D15" at 38.672,23.368 h1
  text "C6" at 41.084,23.368 h1
  text "D4" at -38.925,23.114 h1
  text "D3" at -36.639,23.114 h1
  text "SD CARD" at -20.812,23.021 h1
  text "A15" at -26.341,21.658 h0.63
  text "C9" at -25.188,21.658 h0.63
  text "C8" at -24.071,21.658 h0.63
  text "GND" at -22.644,21.658 h0.63
  text "C12" at -20.609,21.658 h0.63
  text "3V3" at -19.356,21.658 h0.63
  text "D2" at -17.959,21.658 h0.63
  text "C11" at -16.689,21.658 h0.63
  text "C10" at -15.292,21.658 h0.63
  text "D13" at 38.672,20.955 h1
  text "D14" at 41.084,20.955 h1
  text "D6" at -38.925,20.701 h1
  text "D5" at -36.639,20.701 h1
  text "D11" at 38.672,18.288 h1
  text "D12" at 41.084,18.288 h1
  text "B3" at -38.925,18.034 h1
  text "D7" at -36.639,18.034 h1
  text "D9" at 38.672,15.748 h1
  text "D10" at 41.084,15.748 h1
  text "B5" at -38.925,15.494 h1
  text "B4" at -36.639,15.494 h1
  text "B15" at 38.672,13.208 h1
  text "D8" at 41.084,13.208 h1
  text "B7" at -38.925,12.954 h1
  text "B6" at -36.639,12.954 h1
  text "B13" at 38.672,10.668 h1
  text "B14" at 41.084,10.668 h1
  text "B9" at -38.925,10.414 h1
  text "B8" at -36.639,10.414 h1
  text "GND" at 38.672,8.255 h1
  text "B12" at 41.084,8.128 h1
  text "E1" at -38.925,8.001 h1
  text "E0" at -36.639,7.874 h1
  text "GND" at 38.51,-9.762 h1
  text "B10" at 40.923,-9.762 h1
  text "B11" at 38.481,-12.319 h1
  text "E14" at 40.894,-12.319 h1
  text "E15" at 38.544,-14.859 h1
  text "E12" at 40.831,-14.859 h1
  text "E2" at -39.052,-15.24 h1
  text "5V" at -36.512,-15.24 h1
  text "E13" at 38.544,-17.399 h1
  text "E10" at 40.831,-17.399 h1
  text "E4" at -39.052,-17.907 h1
  text "E3" at -36.512,-17.907 h1
  text "E11" at 38.544,-19.939 h1
  text "E8" at 40.831,-19.939 h1
  text "E6" at -39.052,-20.447 h1
  text "E5" at -36.512,-20.447 h1
  text "E9" at 38.544,-22.479 h1
  text "B2" at 40.831,-22.479 h1
  text "C14" at -39.052,-22.987 h1
  text "C13" at -36.512,-22.987 h1
  text "E7" at 38.544,-24.892 h1
  text "B0" at 40.831,-24.892 h1
  text "H0" at -39.052,-25.527 h1
  text "C15" at -36.512,-25.527 h1
  text "B1" at 38.544,-27.559 h1
  text "C5" at 40.831,-27.559 h1
  text "C0" at -39.052,-28.067 h1
  text "H1" at -36.512,-28.067 h1
  text "C4" at 38.544,-30.099 h1
  text "A7" at 40.831,-30.099 h1
  text "C2" at -39.052,-30.607 h1
  text "C1" at -36.512,-30.607 h1
  text "A6" at 38.544,-32.639 h1
  text "A5" at 40.831,-32.639 h1
  text "A0" at -39.052,-33.147 h1
  text "C3" at -36.512,-33.147 h1
  text "A4" at 38.544,-35.179 h1
  text "A3" at 40.831,-35.179 h1
  text "A2" at -39.052,-35.433 h1
  text "A1" at -36.512,-35.433 h1
  text "GND" at -38.999,-37.156 h1
  text "GND" at -36.573,-37.156 h1
  text "3V3" at 38.544,-37.592 h1
  text "3V3" at 40.831,-37.719 h1
Top Solder:
  text "RYA" at -23.495,-39.116 h7
Drill Guide:
  the board outline again, w0.508

## Text inside footprints (layer, text, board x,y; h text height)
C23: Bottom Overlay "+" at -15.084,8.644 h1.22
C24: Bottom Overlay "+" at -2.04,-2.945 h1.22 r90
D1: Top Overlay "+" at -15.875,11.303 h0.76
D6: Top Overlay "+" at -13.97,11.303 h0.76
D7: Top Overlay "+" at -9.906,11.303 h0.76
D9: Top Overlay "+" at -8.128,11.303 h0.76
D12: Top Overlay "+" at 5.588,31.877 h0.76 r180
D13: Top Overlay "+" at 6.731,27.305 h0.76
D14: Top Overlay "+" at -11.938,11.303 h0.76
J3: Bottom Overlay "24" at -29.9,38.9 h1.02 r270; Bottom Overlay "23" at -35.1,39 h1.02 r270; Bottom Overlay "1" at -35.1,6.8 h1.02 r270; Bottom Overlay "2" at -29.9,6.4 h1.02 r270
J4: Bottom Overlay "24" at 29.9,7.1 h1.02 r90; Bottom Overlay "23" at 35.1,7 h1.02 r90; Bottom Overlay "1" at 35.1,39.2 h1.02 r90; Bottom Overlay "2" at 29.9,39.6 h1.02 r90
J6: Bottom Overlay "2" at 34.1,-39.6 h1.02 r270; Bottom Overlay "1" at 28.9,-39.2 h1.02 r270; Bottom Overlay "23" at 28.9,-7 h1.02 r270; Bottom Overlay "24" at 34.1,-7.1 h1.02 r270
J7: Bottom Overlay "2" at -34.1,-11.94 h1.02 r90; Bottom Overlay "1" at -28.9,-12.34 h1.02 r90; Bottom Overlay "19" at -28.9,-39.46 h1.02 r90; Bottom Overlay "20" at -34.1,-39.36 h1.02 r90
J9: Top Overlay "2" at 14.961,27.623 h1.02 r90; Top Overlay "4" at 14.961,34.923 h1.02 r90; Top Overlay "1" at 9.711,27.973 h1.02 r90; Top Overlay "3" at 9.711,34.923 h1.02 r90
J10: Top Overlay "3" at -14.349,31.936 h1.02 r180; Top Overlay "1" at -7.399,31.936 h1.02 r180; Top Overlay "4" at -14.349,37.186 h1.02 r180; Top Overlay "2" at -7.049,37.186 h1.02 r180
J11: Top Overlay "6" at -13.022,29.362 h1.02 r90; Top Overlay "5" at -7.822,29.462 h1.02 r90; Top Overlay "2" at -13.022,19.722 h1.02 r90; Top Overlay "1" at -7.822,20.122 h1.02 r90
J12: Top Overlay "1" at 14.919,20.383 h1.02 r180; Top Overlay "3" at 10.019,20.383 h1.02 r180; Top Overlay "4" at 10.019,13.383 h1.02 r180; Top Overlay "2" at 15.219,13.383 h1.02 r180
P1: Top Overlay "2" at 25,-22.83 h1.02 r270; Top Overlay "1" at 18,-23.13 h1.02 r270; Top Overlay "5" at 18,-30.57 h1.02 r270; Top Overlay "6" at 25,-30.57 h1.02 r270
P2: Top Overlay "1" at -28,7.8 h1.02 r90; Top Overlay "2" at -35,7.5 h1.02 r90; Top Overlay "23" at -28,37.9 h1.02 r90; Top Overlay "24" at -35,37.9 h1.02 r90
P3: Top Overlay "1" at 28,38.2 h1.02 r270; Top Overlay "2" at 35,38.5 h1.02 r270; Top Overlay "23" at 28,8.1 h1.02 r270; Top Overlay "24" at 35,8.1 h1.02 r270
P15: Top Overlay "24" at 29,-8.1 h1.02 r90; Top Overlay "23" at 36,-8.1 h1.02 r90; Top Overlay "2" at 29,-38.5 h1.02 r90; Top Overlay "1" at 36,-38.2 h1.02 r90
P16: Top Overlay "2" at -29,-12.94 h1.02 r270; Top Overlay "1" at -36,-13.24 h1.02 r270; Top Overlay "19" at -36,-38.46 h1.02 r270; Top Overlay "20" at -29,-38.46 h1.02 r270
P17: Top Overlay "8" at 19.098,-11.924 h1.02 r90; Top Overlay "7" at 26.098,-11.924 h1.02 r90; Top Overlay "1" at 26.098,-21.904 h1.02 r90; Top Overlay "2" at 19.098,-22.204 h1.02 r90
P18: Top Overlay "2" at 35,5.44 h1.02 r270; Top Overlay "1" at 28,5.14 h1.02 r270; Top Overlay "7" at 28,-4.84 h1.02 r270; Top Overlay "8" at 35,-4.84 h1.02 r270